# Altium PCB PCB1.PcbDoc
Units mm, origin at the board's own origin, x right, y up, seen from the top; angles counter-clockwise.
Board outline 110 x 98 mm, 2 copper layers (Top Layer, Bottom Layer); 74 components, 67 nets, 275 pads, 20 vias.
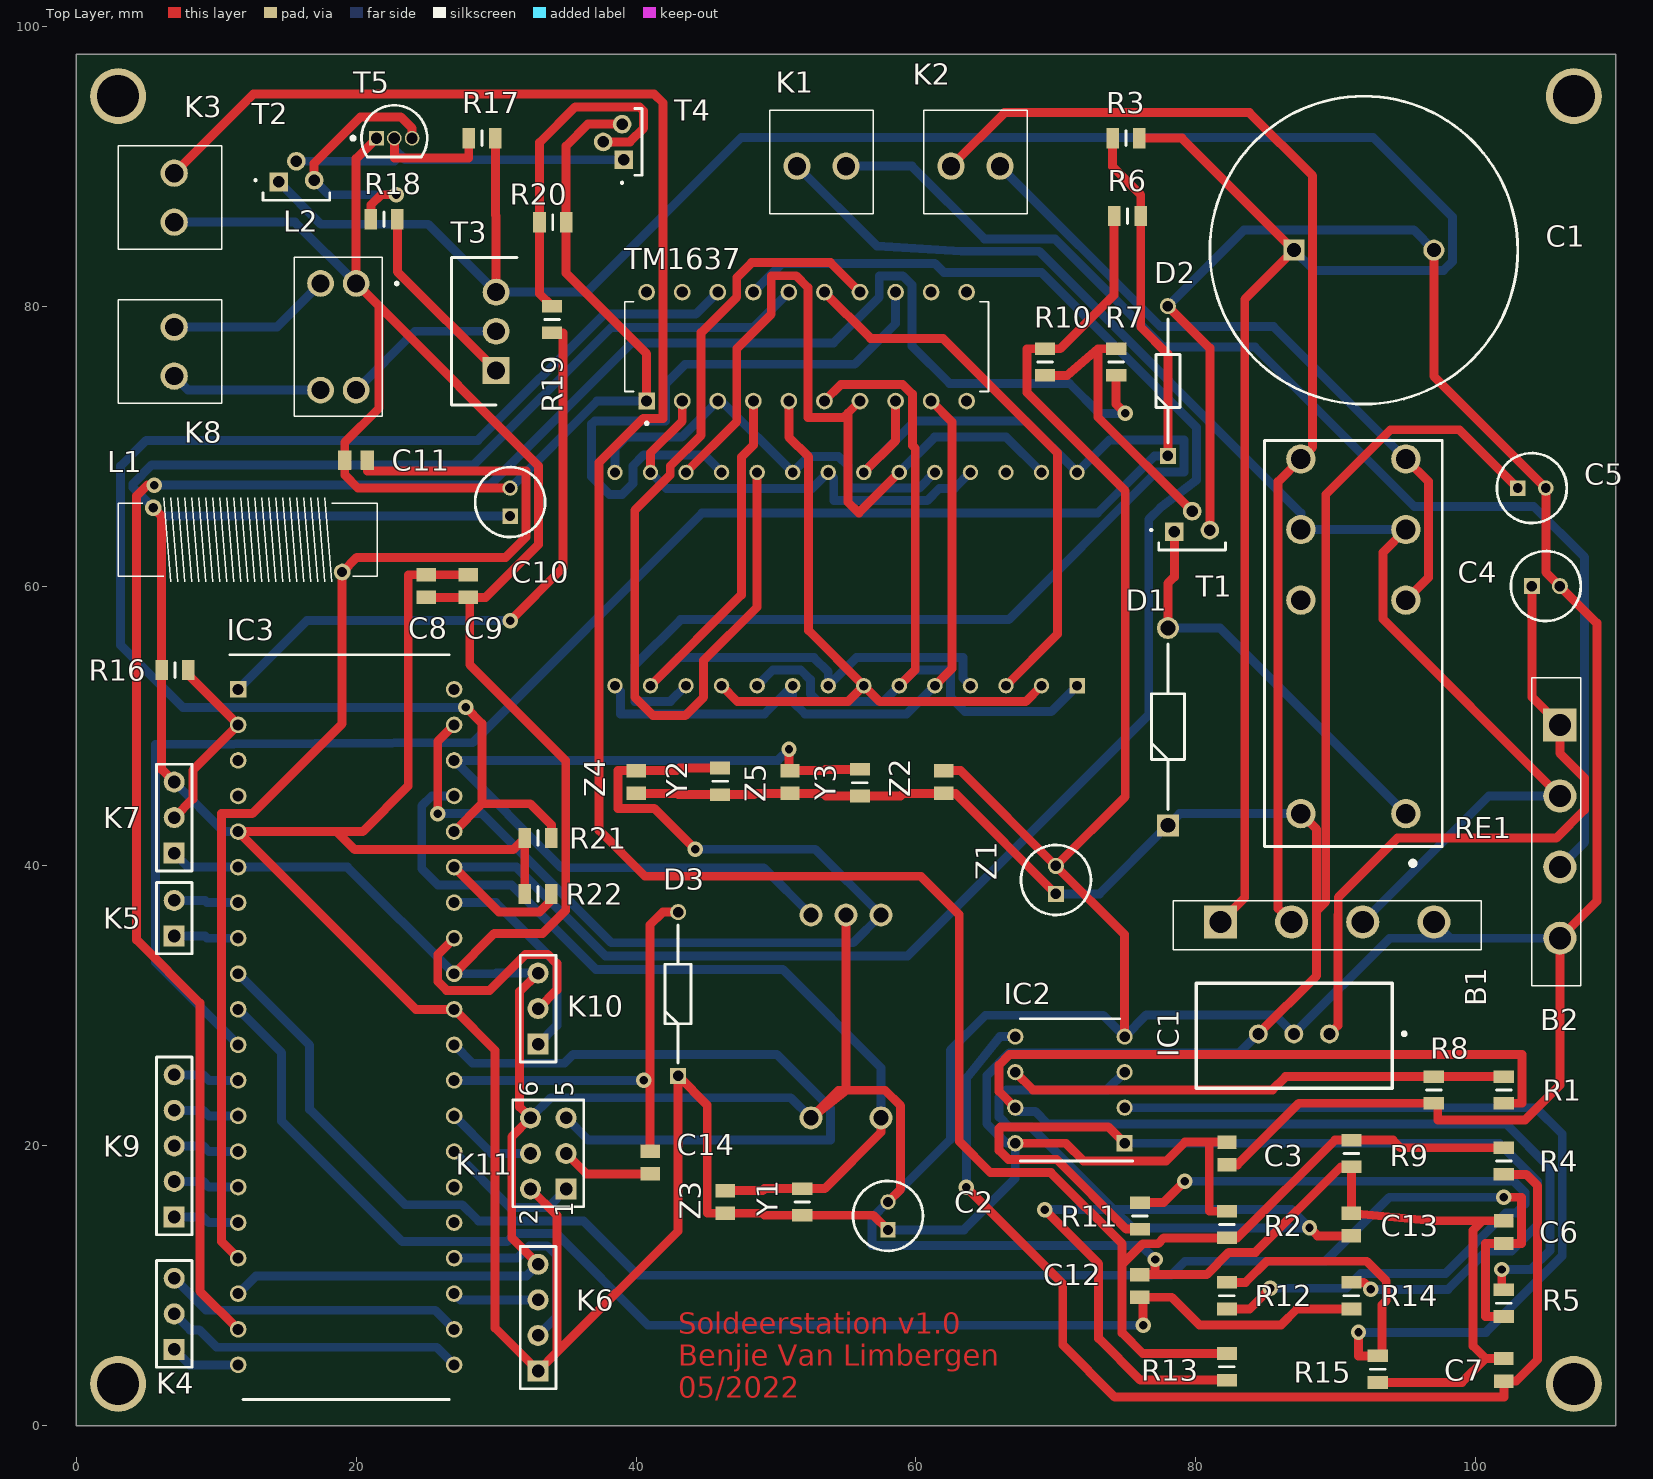
[diagram p0: Top Layer view]
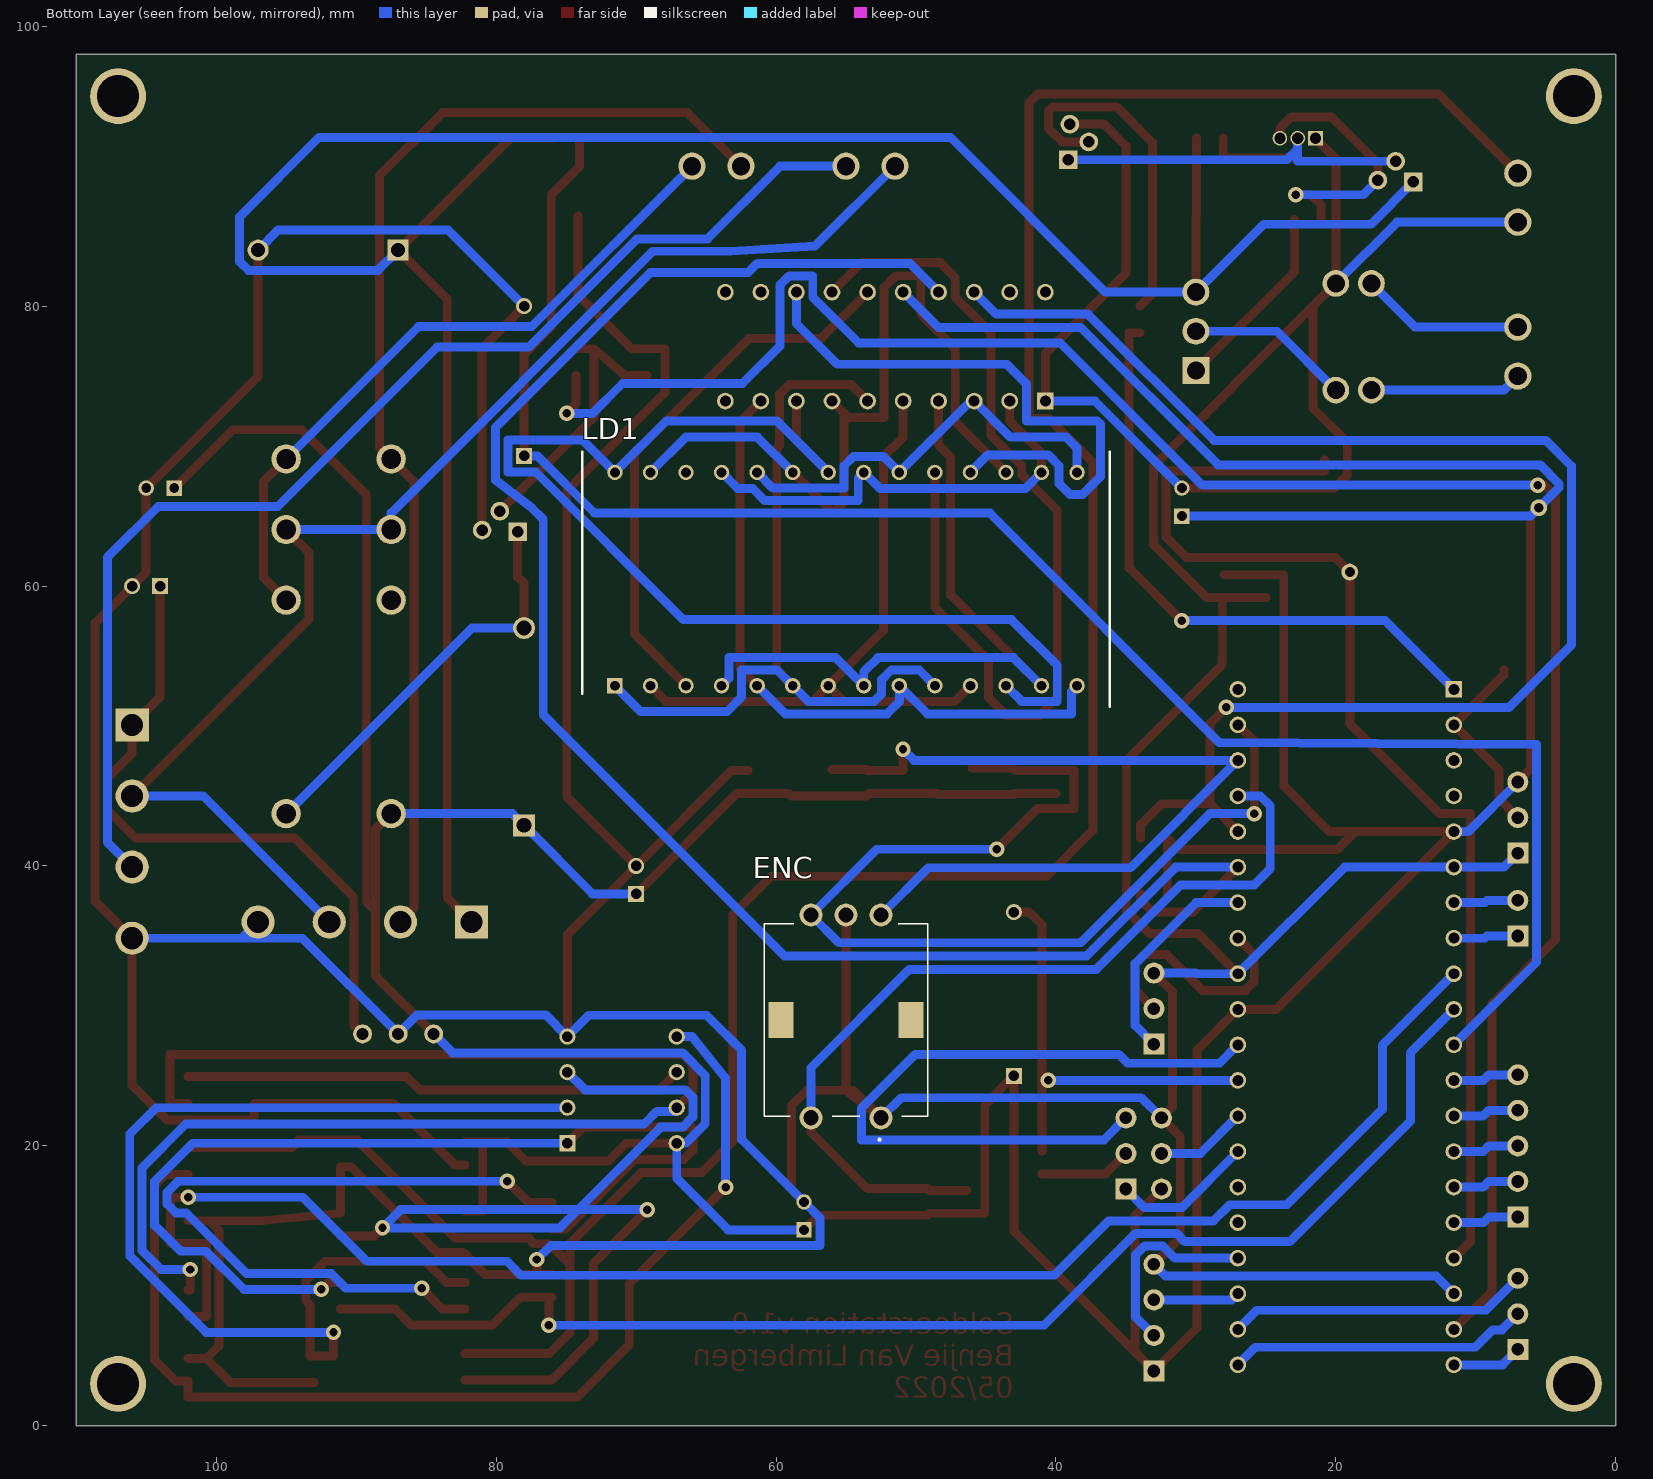
[diagram p1: Bottom Layer view, seen from below]

## Layer stack, top to bottom
Top Solder: solder mask 0.0102, Solder Resist, Dk 3.5
Top Layer: signal copper 0.0356
Dielectric 1: dielectric 0.32, FR-4, Dk 4.8
Bottom Layer: signal copper 0.0356
Bottom Solder: solder mask 0.0102, Solder Resist, Dk 3.5

## Board outline
0,0 0,98 110,98 110,0

## Design rules (kind name [scope] priority, off if disabled: settings)
Clearance Clearance_1 [All] p1: gap=0.254 ignorepadtopadclearanceinfootprint=FALSE except(0: Arc-Hole Track-Hole SMDPad-Hole THPad-Hole Via-Hole Fill-Hole Poly-Hole Region-Hole Text-Hole)
Clearance [All] p2: gap=0.254 ignorepadtopadclearanceinfootprint=FALSE except(0: Arc-Hole Track-Hole SMDPad-Hole THPad-Hole Via-Hole Fill-Hole Poly-Hole Region-Hole Text-Hole)
PolygonConnect [All] p1: connectstyle=Relief reliefconductorwidth=0.254 reliefentries=4 polygonreliefangle="90 Angle" airgapwidth=0.254
RoomDefinition voeding [InComponentClass('voeding')] p1: confinementstyle=ConfineIn formatcopy=TRUE lockcomponents=FALSE outline 0,-12 7,-12 7,-9 0,-9
RoomDefinition opamps [InComponentClass('opamps')] p2: confinementstyle=ConfineIn formatcopy=TRUE lockcomponents=FALSE outline 111,-10 122,-10 122,3 111,3
RoomDefinition main [InComponentClass('main')] p3: confinementstyle=ConfineIn formatcopy=TRUE lockcomponents=FALSE outline 0,-12 50.8,-12 50.8,13.4 0,13.4
RoomDefinition display [InComponentClass('display')] p4: confinementstyle=ConfineIn formatcopy=TRUE lockcomponents=FALSE outline 0,-12 50.8,-12 50.8,13.4 0,13.4
RoutingVias [All] p1: holewidth=0.6 width=1.1 viastyle="Through Hole" minholewidth=0.6 minwidth=1.1 maxholewidth=0.6 maxwidth=1.1
SolderMaskExpansion [All] p1: expansion=0.102 istentingtop=FALSE
Width [All] p1: maxlimit=1.27 minlimit=0.635 preferedwidth=0.635 minimp=50.000000 maximp=50.000000 favimp=50.000000
30 further rules are at their usual default settings.

## Classes and differential pairs
component class voeding: B1 B2 C1 C4 C5 D1 D2 IC1 K1 K2 R3 R6 R7 R10 RE1 T1
component class opamps: C2 C3 C6 C7 C12 C13 IC2 K3 R1 R2 R4 R5 R8 R9 R11 R12 R13 R14 R15
component class main: C8 C9 C10 C11 C14 D3 IC3 K4 K5 K6 K7 K8 K9 K10 K11 L1 L2 R16 R17 R18 R19 R20 R21 R22 T2 T3 T4 T5
component class display: ENC LD1 TM1637 Y1 Y2 Y3 Z1 Z2 Z3 Z4 Z5

## Components (designator, comment, footprint, x,y, rotation, side; value= is the part's Value field where it differs from the comment)
B1 "GBU6J" GBU6J 81.76,36 r180 top
B2 "GBU6J" GBU6J 106,50.08 r90 top
C1 "860010683032" CAPPRD1000W80D2200H4100 87,84 r0 top
C2 "860240672002" CAPPRD200W52D500H1250 58,14 r90 top
C3 "885012207098" CAPC2012X90N 82.22,19.46 r90 top
C4 "100uF" CAPPRD200W55D500H1200 104,60 r0 top
C5 "860010683032" CAPPRD200W52D500H1250 103,67 r0 top
C6 "885012205067" CAPC2012X90N 102,13.84 r90 top
C7 "885012205067" CAPC2012X90N 102,4 r90 top
C8 "885012207098" CAPC2012X90N 25,60 r90 top
C9 "885012207098" CAPC2012X90N 28,60 r90 top
C10 "860240672002" CAPPRD200W52D500H1250 31,65 r90 top
C11 "885012207098" CAPC2012X90N 20,69 r0 top
C12 "885012205067" CAPC2012X90N 76,10 r90 top
C13 "885012205067" CAPC2012X90N 91.11,14.38 r90 top
C14 "885012207092" CAPC2012X90N 41,18.81 r90 top
D1 "1N4007" DIOAD1410W86L470D235 78,42.9 r90 top
D2 "1N5231BTR" DIOAD1068W53L380D172 78,69.3 r90 top
D3 "1N4148" DIOAD1165W56L425D185 43,25 r90 top
ENC "482016514001" 482016514001 55,29 r90 bottom locked
IC1 "TSR_2-2450" TSR-2 94.04,24.11 r180 top
IC2 "MCP6002-E_P" DIP781W56P254L950H533Q8N 71,24 r180 top
IC3 "ATMEGA4809-PF" DIP1543W58P254L5175H635Q40N 19.285,28.49 r0 top
K1 "691214110002" 691214110002 51.5,90 r0 top
K2 "691214110002" 691214110002 62.5,90 r0 top
K3 "691214110002" 691214110002 7,86 r90 top
K4 "61300311121" HDR1X3 7,5.46 r90 top
K5 "61300211121" HDR1X2 7,35 r90 top
K6 "61000418221" HDR1X4 33,3.92 r90 top
K7 "61300311121" HDR1X3 7,40.92 r90 top
K8 "691214110002" 691214110002 7,75 r90 top
K9 "61300511121" HDR1X5 7,14.92 r90 top
K10 "61300311121" HDR1X3 33,27.271 r90 top
K11 "61000621121" HDR2X3 35,16.92 r90 top
L1 "744711003" 744711003 19,61 r180 top
L2 "CM2545X171B-10" CM2545X171B10 20,81.62 r180 top
LD1 "LB-603MF" DIP1524W50P254L3750H820Q28N 55,60.5 r90 bottom locked
R1 "smd" RESC2012X60N 102,24 r90 top
R2 "smd" RESC2012X60N 82.22,14.38 r90 top
R3 "CRCW08051M00JNEAC" RESC2012X60N 75,92 r0 top
R4 "smd" RESC2012X60N 102,18.92 r90 top
R5 "smd" RESC2012X60N 102,8.76 r90 top
R6 "CRCW08051M00JNEAC" RESC2012X60N 75.11,86.434 r0 top
R7 "CRCW08051M00JNEAC" RESC2012X60N 74.3,76.004 r90 top
R8 "smd" RESC2012X60N 97,24 r90 top
R9 "smd" RESC2012X60N 91.11,19.46 r90 top
R10 "CRCW08051M00JNEAC" RESC2012X60N 69.22,76.004 r90 top
R11 "smd" RESC2012X60N 76,15 r90 top
R12 "smd" RESC2012X60N 82.22,9.3 r90 top
R13 "smd" RESC2012X60N 82.22,4.22 r90 top
R14 "smd" RESC2012X60N 91.11,9.3 r90 top
R15 "smd" RESC2012X60N 93,4.05 r90 top
R16 "C" RESC2012X60N 7.05,54 r0 top
R17 "smd" RESC2012X60N 29,92 r0 top
R18 "smd" RESC2012X60N 22,86.209 r0 top
R19 "smd" RESC2012X60N 34,79.05 r90 top
R20 "smd" RESC2012X60N 34.05,86 r0 top
R21 "CRCW08051M00JNEAC" RESC2012X60N 33,42 r0 top
R22 "CRCW08051M00JNEAC" RESC2012X60N 33,38 r0 top
RE1 "RT424005" RT42 91.25,43.74 r90 top (schematic designator X1)
T1 "BC547CBU" BC547CBU 78.46,64 r0 top
T2 "BC547CBU" BC547CBU 14.46,89 r0 top
T3 "IRF9Z34NPBF" TO254P469X1042X1967-3P 30,75.666 r90 top
T4 "BC547CBU" BC547CBU 39,90.46 r90 top
T5 "BC557CG" ONSC-TO-92-3-29-11 22.73,92 r0 top
TM1637 "*" DIP778W43P254L2612H431Q20N 52.19,77.11 r90 top
Y1 "ESR10EZPJ183" RESC2012X60N 51.875,16 r90 top
Y2 "ESR10EZPJ183" RESC2012X60N 46,46.05 r90 top
Y3 "ESR10EZPJ183" RESC2012X60N 56,45.95 r90 top
Z1 "860010683032" CAPPRD200W55D500H1200 70,38 r90 top
Z2 "860240672002" CAPC2012X90N 62,46 r90 top
Z3 "100uF" CAPC2012X90N 46.375,16 r90 top
Z4 "100uF" CAPC2012X90N 40,46 r90 top
Z5 "100uF" CAPC2012X90N 51,46 r90 top

## Footprints (in the part's own frame and the unit in brackets; to place one, negate y for a bottom-side part, rotate by r counter-clockwise, add the part's x,y. Pads: shape width x height; smd on the part's side, far side on the other; paste and mask are expansions set on the pad)
744711003 [mm]
  round 1.2 hole 0.7: 1(0,0) 2(13.5,-4.6)
  silkscreen extent -2.5,-5.3 16,0.7, body extent -2.5,-4.9 16,0.3, height 6.3
482016514001 [mm]
  round 1.65 hole 1.1: 1(-7,-2.5) 2(-7,2.5) 3(7.5,-2.5) 4(7.5,0) 5(7.5,2.5)
  rect 2.6x1.8 smd: MP1(0,-4.65) MP2(0,4.65)
  silkscreen extent -8.6,-5.85 6.88,5.85, body extent -7.45,-5.85 7.95,5.85, height 27
691214110002 [mm]
  round 1.95 hole 1.3: 1(0,0) 2(3.5,0)
  silkscreen extent -1.95,-3.4 5.45,4, body extent -1.95,-3.4 5.45,4, height 8.8
BC547CBU [mm]
  rect 1.333x1.333 hole 0.82: 1(0,-0.127)
  round 1.333 hole 0.82: 2(1.27,1.35) 3(2.54,0)
  silkscreen extent -1.7,-1.43 3.65,0.05, body extent -1.11,-1.43 3.65,2.19, height 5.43
CAPC2012X90N [mm]
  rect 0.96x1.39 smd: 1(-0.81,0) 2(0.81,0)
  body extent -1,-0.63 1,0.63, height 0.9
CAPPRD200W52D500H1250 [mm]
  rect 1.1x1.1 hole 0.7: 1(0,0)
  round 1.1 hole 0.7: 2(2,0)
  silkscreen extent -1.5,-2.5 3.5,2.5, body extent -1.75,-2.75 3.75,2.75, height 12.5
CAPPRD200W55D500H1200 [mm]
  rect 1.15x1.15 hole 0.75: 1(0,0)
  round 1.15 hole 0.75: 2(2,0)
  silkscreen extent -1.5,-2.5 3.5,2.5, body extent -1.75,-2.75 3.75,2.75, height 12
CAPPRD1000W80D2200H4100 [mm]
  rect 1.5x1.5 hole 1: 1(0,0)
  round 1.5 hole 1: 2(10,0)
  silkscreen extent -6,-11 16,11, body extent -6.25,-11.25 16.25,11.25, height 41
CM2545X171B10 [mm]
  round 1.905 hole 1.27: 1(0,0) 2(2.54,0) 3(2.54,7.62) 4(0,7.62)
  silkscreen extent -3,-1.88 4.42,9.5, body extent -1.88,-1.88 4.42,9.5, height 9.6
DIOAD1068W53L380D172 [mm]
  rect 1.15x1.15 hole 0.75: 1(0,0)
  round 1.15 hole 0.75: 2(10.7,0)
  silkscreen extent 0.93,-0.86 9.78,0.86, body extent -0.26,-0.95 10.95,0.95, height 1.9
DIOAD1165W56L425D185 [mm]
  rect 1.15x1.15 hole 0.75: 1(0,0)
  round 1.15 hole 0.75: 2(11.7,0)
  silkscreen extent 0.93,-0.93 10.78,0.92, body extent -0.28,-0.92 11.93,0.92, height 1.84
DIOAD1410W86L470D235 [mm]
  rect 1.575x1.575 hole 1.05: 1(0,0)
  round 1.575 hole 1.05: 2(14.1,0)
  silkscreen extent 1.14,-1.18 12.96,1.18, body extent -0.43,-1.35 14.53,1.35, height 2.69
DIP778W43P254L2612H431Q20N [mm] "TM1637"
  rect 1.19x1.19 hole 0.79: 1(-3.89,11.43)
  round 1.19 hole 0.79: 2(-3.89,8.89) 3(-3.89,6.35) 4(-3.89,3.81) 5(-3.89,1.27) 6(-3.89,-1.27) 7(-3.89,-3.81) 8(-3.89,-6.35) 9(-3.89,-8.89) 10(-3.89,-11.43) 11(3.89,-11.43) 12(3.89,-8.89) 13(3.89,-6.35) 14(3.89,-3.81) 15(3.89,-1.27) 16(3.89,1.27) 17(3.89,3.81) 18(3.89,6.35) 19(3.89,8.89) 20(3.89,11.43)
  silkscreen extent -5.58,-13 3.2,13, body extent -4.03,-13 4.03,13, height 4.31
DIP781W56P254L950H533Q8N [mm]
  rect 1.158x1.158 hole 0.758: 1(-3.905,3.81)
  round 1.158 hole 0.758: 2(-3.905,1.27) 3(-3.905,-1.27) 4(-3.905,-3.81) 5(3.905,-3.81) 6(3.905,-1.27) 7(3.905,1.27) 8(3.905,3.81)
  silkscreen extent -4.48,-5.08 3.56,5.08, body extent -4.04,-4.75 4.04,4.75, height 5.33
DIP1524W50P254L3750H820Q28N [mm]
  rect 1.1x1.1 hole 0.7: 1(-7.62,16.51)
  round 1.1 hole 0.7: 2(-7.62,13.97) 3(-7.62,11.43) 4(-7.62,8.89) 5(-7.62,6.35) 6(-7.62,3.81) 7(-7.62,1.27) 8(-7.62,-1.27) 9(-7.62,-3.81) 10(-7.62,-6.35) 11(-7.62,-8.89) 12(-7.62,-11.43) 13(-7.62,-13.97) 14(-7.62,-16.51) 15(7.62,-16.51) 16(7.62,-13.97) 17(7.62,-11.43) 18(7.62,-8.89) 19(7.62,-6.35) 20(7.62,-3.81) 21(7.62,-1.27) 22(7.62,1.27) 23(7.62,3.81) 24(7.62,6.35) 25(7.62,8.89) 26(7.62,11.43) 27(7.62,13.97) 28(7.62,16.51)
  silkscreen extent -9.1,-18.85 9.1,18.85, body extent -9,-18.75 9,18.75, height 8.2
DIP1543W58P254L5175H635Q40N [mm]
  rect 1.184x1.184 hole 0.784: 1(-7.715,24.13)
  round 1.184 hole 0.784: 2(-7.715,21.59) 3(-7.715,19.05) 4(-7.715,16.51) 5(-7.715,13.97) 6(-7.715,11.43) 7(-7.715,8.89) 8(-7.715,6.35) 9(-7.715,3.81) 10(-7.715,1.27) 11(-7.715,-1.27) 12(-7.715,-3.81) 13(-7.715,-6.35) 14(-7.715,-8.89) 15(-7.715,-11.43) 16(-7.715,-13.97) 17(-7.715,-16.51) 18(-7.715,-19.05) 19(-7.715,-21.59) 20(-7.715,-24.13) 21(7.715,-24.13) 22(7.715,-21.59) 23(7.715,-19.05) 24(7.715,-16.51) 25(7.715,-13.97) 26(7.715,-11.43) 27(7.715,-8.89) 28(7.715,-6.35) 29(7.715,-3.81) 30(7.715,-1.27) 31(7.715,1.27) 32(7.715,3.81) 33(7.715,6.35) 34(7.715,8.89) 35(7.715,11.43) 36(7.715,13.97) 37(7.715,16.51) 38(7.715,19.05) 39(7.715,21.59) 40(7.715,24.13)
  silkscreen extent -8.31,-26.61 7.37,26.61, body extent -7.86,-25.88 7.86,25.88, height 6.35
GBU6J [mm]
  rect 2.37x2.37 hole 1.58: 1(0,0)
  round 2.37 hole 1.58: 2(-5.08,0) 3(-10.16,0) 4(-15.24,0)
  silkscreen extent -18.62,-1.5 3.38,2, body extent -18.62,-1.5 3.38,2, height 18.9
HDR1X2 [mm] "Connector; Header; 2 Position"
  rect 1.5x1.5 hole 0.9: 1(0,0)
  round 1.5 hole 0.9: 2(2.54,0)
  silkscreen extent -1.27,-1.27 3.81,1.27
HDR1X3 [mm] "Connector; Header; 3 Position"
  rect 1.5x1.5 hole 0.9: 1(0,0)
  round 1.5 hole 0.9: 2(2.54,0) 3(5.08,0)
  silkscreen extent -1.27,-1.27 6.35,1.27
HDR1X4 [mm] "Connector; Header; 4 Position"
  rect 1.5x1.5 hole 0.9: 1(0,0)
  round 1.5 hole 0.9: 2(2.54,0) 3(5.08,0) 4(7.62,0)
  silkscreen extent -1.27,-1.27 8.89,1.27
HDR1X5 [mm] "Connector; Header; 5 Position"
  rect 1.5x1.5 hole 0.9: 1(0,0)
  round 1.5 hole 0.9: 2(2.54,0) 3(5.08,0) 4(7.62,0) 5(10.16,0)
  silkscreen extent -1.27,-1.27 11.43,1.27
HDR2X3 [mm] "Connector; Header; 3x2 Position"
  rect 1.5x1.5 hole 0.9: 1(0,0)
  round 1.5 hole 0.9: 2(0,2.54) 3(2.54,0) 4(2.54,2.54) 5(5.08,0) 6(5.08,2.54)
  silkscreen extent -1.27,-1.27 6.35,3.81
ONSC-TO-92-3-29-11 [mm] "TO, 3-Leads, Body Dia 4.7mm, Pitch 1.27mm"
  rect 1.05x1.05 hole 0.8: 1(-1.27,0)
  round 1.05 hole 0.8: 2(0,0) 3(1.27,0)
  silkscreen extent -3.07,-1.34 2.35,2.35, body extent -2.35,-1.33 2.36,2.36, height 7.87
RESC2012X60N [mm]
  rect 0.9x1.45 smd: 1(-0.95,0) 2(0.95,0)
  silkscreen extent 0,-0.53 0,0.53, body extent -1,-0.63 1,0.63, height 0.6
RT42 [mm]
  round 2.1 hole 1.4: 1(0,-3.75) 2(15.26,-3.75) 3(20.3,-3.75) 4(25.34,-3.75) 5(25.34,3.75) 6(20.3,3.75) 7(15.26,3.75) 8(0,3.75)
  silkscreen extent -3.67,-6.35 26.65,6.35, body extent -2.21,-6.35 26.79,6.35, height 15.86
TO254P469X1042X1967-3P [mm]
  rect 1.92x1.92 hole 1.28: 1(-0.254,0)
  round 1.92 hole 1.28: 2(2.54,0) 3(5.334,0)
  silkscreen extent -2.73,-1.49 7.81,3.2, body extent -2.67,-1.5 7.75,3.19, height 18.84
TSR-2 [mm]
  round 1.35 hole 0.85: 1(4.5,-3.89) 2(7.04,-3.89) 3(9.58,-3.89)
  silkscreen extent -0.96,-7.5 14,0, body extent 0.01,-7.5 14.01,0, height 10.33

## Part data
B1 B2: "Bridge Rectifier", Manufacturer_Name="GeneSiC Semiconductor", Datasheet Link=https://www.diodemodule.com/silicon_products/bridge_rectifiers/gbu6j.pdf, Height=18.8mm, Manufacturer_Part_Number=GBU6J
C1: "Capacitor C1 4700u 50v", Manufacturer_Name="Wurth Elektronik", Datasheet Link=https://componentsearchengine.com/Datasheets/2/860010683032.pdf, Height=41mm, Manufacturer_Part_Number=860010683032
C2: "Capacitor Polarised 10uf 50v stee 2mm 5x11mm", Manufacturer_Name="Wurth Elektronik", Datasheet Link=https://katalog.we-online.de/pbs/datasheet/860240672002.pdf, Height=12.5mm, Manufacturer_Part_Number=860240672002
C3: "Capacitor, C3,C8,C9,C11,C14 100nf", Manufacturer_Name="Wurth Elektronik", Mouser2 Part Number=710-885012207098, Datasheet Link=https://componentsearchengine.com//885012207098.pdf, Height=0.9mm, Manufacturer_Part_Number=885012207098, Mouser2 Price/Stock=https://www.mouser.com/Search/Refine.aspx?Keyword=710-885012207098
C4: library part ECA-1HHG2R2B, "Capacitor Polarised C4", Manufacturer_Name=Panasonic, Datasheet Link=http://industrial.panasonic.com/cdbs/www-data/pdf/RDF0000/ABA0000C1215.pdf, Height=12mm, Manufacturer_Part_Number=ECA-1HHG2R2B
C5: "Capacitor C5", Manufacturer_Name="Wurth Elektronik", Datasheet Link=https://componentsearchengine.com/Datasheets/2/860010683032.pdf, Height=41mm, Manufacturer_Part_Number=860010683032
C6 C7 C12 C13: "Capacitor C6, C7, C12,C13", Manufacturer_Name="Wurth Elektronik", Datasheet Link=https://katalog.we-online.com/pbs/datasheet/885012205067.pdf, Height=0.55mm, Manufacturer_Part_Number=885012205067
C8 C9 C11: "Capacitor, C3,C8,C9,C11,C14", Manufacturer_Name="Wurth Elektronik", Mouser2 Part Number=710-885012207098, Datasheet Link=https://componentsearchengine.com//885012207098.pdf, Height=0.9mm, Manufacturer_Part_Number=885012207098, Mouser2 Price/Stock=https://www.mouser.com/Search/Refine.aspx?Keyword=710-885012207098
C10: "Capacitor Polarised c10", Manufacturer_Name="Wurth Elektronik", Datasheet Link=https://katalog.we-online.de/pbs/datasheet/860240672002.pdf, Height=12.5mm, Manufacturer_Part_Number=860240672002
C14: "Capacitor c14 100n", Manufacturer_Name="Wurth Elektronik", Datasheet Link=https://katalog.we-online.com/pbs/datasheet/885012207092.pdf, Height=0.9mm, Manufacturer_Part_Number=885012207092
D1: "Diode D1", Manufacturer_Name=MULTICOMP, Datasheet Link=http://www.farnell.com/datasheets/1505911.pdf?_ga=2.248087493.396773729.1562531485-167411096.1502103357, Manufacturer_Part_Number=1N4007
D2: "Zener Diode D2", Manufacturer_Name="ON Semiconductor", Datasheet Link=https://componentsearchengine.com/Datasheets/1/1N5231BTR.pdf, Manufacturer_Part_Number=1N5231BTR
D3: "Diode D3", Manufacturer_Name=Nexperia, Datasheet Link=https://datasheet.datasheetarchive.com/originals/distributors/Datasheets-112/DSAP0040891.pdf, Manufacturer_Part_Number=1N4148
ENC: "Switch", Manufacturer_Name="Wurth Elektronik", Mouser2 Part Number=710-482016514001, Datasheet Link=https://componentsearchengine.com//482016514001.pdf, Height=26.9mm, Manufacturer_Part_Number=482016514001, Mouser2 Price/Stock=https://www.mouser.com/Search/Refine.aspx?Keyword=710-482016514001
IC1: "Power Supply IC1", Manufacturer_Name="Traco Power", Manufacturer_Part_Number="TSR 2-2450", Mouser2 Part Number=495-TSR2-2450, Datasheet Link="https://componentsearchengine.com//TSR 2-2450.pdf", Mouser2 Price/Stock=https://www.mouser.com/Search/Refine.aspx?Keyword=495-TSR2-2450
IC2: "IC Dual Opamp", Manufacturer_Name=Microchip, Manufacturer_Part_Number=MCP6002-E/P, Mouser2 Part Number=579-MCP6002-E/P, Datasheet Link=https://componentsearchengine.com//MCP6002-E_P.pdf, Height=5.334mm, Mouser2 Price/Stock=https://www.mouser.com/Search/Refine.aspx?Keyword=579-MCP6002-E%2FP
IC3: "Integrated Circuit", Manufacturer_Name=Microchip, Mouser2 Part Number=556-ATMEGA4809-PF, Datasheet Link=https://componentsearchengine.com//ATMEGA4809-PF.pdf, Height=6.35mm, Manufacturer_Part_Number=ATMEGA4809-PF, Mouser2 Price/Stock=https://www.mouser.com/Search/Refine.aspx?Keyword=556-ATMEGA4809-PF
K1 K2 K8: "Connector", Manufacturer_Name="Wurth Elektronik", Height=8.7mm, Manufacturer_Part_Number=691214110002
K3: "Connector K3", Manufacturer_Name="Wurth Elektronik", Height=8.7mm, Manufacturer_Part_Number=691214110002
K4 K7: "WR-PHD Pin Header, THT, pitch 2.54mm, Single Row, Vertical, 3p", Contact Resistance=20mOhm, Manufacturer="Wurth Elektronik", Operating Temperature="-40 to +105degC", Rated Current=3A, Withstanding Voltage=500VAC, Working Voltage=250VAC, ComponentLink1Description=Manufacturer, ComponentLink1URL=http://www.we-online.de, ComponentLink2Description=Datasheet, ComponentLink2URL=https://www.we-online.com/catalog/datasheet/61300311121.pdf, Gender="Pin Header", Manufacturer Part Number=61300311121, Mounting Technology=THT, Orientation=Vertical, Packaging=Bag, Pin Number=3, Pitch=2.54mm, Row Number=Single
K5: "WR-PHD Pin Header, THT, pitch 2.54mm, Single Row, Vertical, 2p", Contact Resistance=20mOhm, Manufacturer="Wurth Elektronik", Operating Temperature="-40 to +105degC", Rated Current=3A, Withstanding Voltage=500VAC, Working Voltage=250VAC, ComponentLink1Description=Manufacturer, ComponentLink1URL=http://www.we-online.de, ComponentLink2Description=Datasheet, ComponentLink2URL=https://www.we-online.com/catalog/datasheet/61300211121.pdf, Gender="Pin Header", Manufacturer Part Number=61300211121, Mounting Technology=THT, Orientation=Vertical, Packaging=Bag, Pin Number=2, Pitch=2.54mm, Row Number=Single
K6: "4p Header K6", Contact Resistance=20mOhm, Manufacturer="Wurth Elektronik", Operating Temperature="-40 to +125degC", Rated Current=3A, Withstanding Voltage=500VAC, Working Voltage=250VAC, ComponentLink1Description=Manufacturer, ComponentLink1URL=http://www.we-online.de, ComponentLink2Description=Datasheet, ComponentLink2URL=https://www.we-online.com/catalog/datasheet/61000418221.pdf, Gender="Pin Header", Manufacturer Part Number=61000418221, Mounting Technology=SMT, Orientation=Vertical, Packaging=Tube, Pin Number=4, Pitch=2.54mm, Row Number=Single
K9: "5P Header k9", Contact Resistance=20mOhm, Manufacturer="Wurth Elektronik", Operating Temperature="-40 to +105degC", Rated Current=3A, Withstanding Voltage=500VAC, Working Voltage=250VAC, ComponentLink1Description=Manufacturer, ComponentLink1URL=http://www.we-online.de, ComponentLink2Description=Datasheet, ComponentLink2URL=https://www.we-online.com/catalog/datasheet/61300511121.pdf, Gender="Pin Header", Manufacturer Part Number=61300511121, Mounting Technology=THT, Orientation=Vertical, Packaging=Bag, Pin Number=5, Pitch=2.54mm, Row Number=Single
K10: "3p header K10", Contact Resistance=20mOhm, Manufacturer="Wurth Elektronik", Operating Temperature="-40 to +105degC", Rated Current=3A, Withstanding Voltage=500VAC, Working Voltage=250VAC, ComponentLink1Description=Manufacturer, ComponentLink1URL=http://www.we-online.de, ComponentLink2Description=Datasheet, ComponentLink2URL=https://www.we-online.com/catalog/datasheet/61300311121.pdf, Gender="Pin Header", Manufacturer Part Number=61300311121, Mounting Technology=THT, Orientation=Vertical, Packaging=Bag, Pin Number=3, Pitch=2.54mm, Row Number=Single
K11: "WR-PHD Pin Header, SMT, pitch 2.54mm, Dual Row, Vertical, 6p", Contact Resistance=20mOhm, Manufacturer="Wurth Elektronik", Operating Temperature="-40 to +125degC", Rated Current=3A, Withstanding Voltage=500VAC, Working Voltage=250VAC, ComponentLink1Description=Manufacturer, ComponentLink1URL=http://www.we-online.de, ComponentLink2Description=Datasheet, ComponentLink2URL=https://www.we-online.com/catalog/datasheet/61000621121.pdf, Gender="Pin Header", Manufacturer Part Number=61000621121, Mounting Technology=SMT, Orientation=Vertical, Packaging=Tube, Pin Number=6, Pitch=2.54mm, Row Number=Dual
L1: "Inductor, Smoorspoel 10uH", Manufacturer_Name="Wurth Elektronik", Datasheet Link=https://www.we-online.de/katalog/datasheet/744711003.pdf, Height=6.2mm, Manufacturer_Part_Number=744711003
L2: "Transformer", Manufacturer_Name="Laird Technologies", Datasheet Link=https://datasheet.datasheetarchive.com/originals/dk/DKDS-7/122753.pdf, Height=9.5mm, Manufacturer_Part_Number=CM2545X171B-10
LD1: "Display", Manufacturer_Name="ROHM Semiconductor", Datasheet Link=https://datasheet.datasheetarchive.com/originals/distributors/Datasheets_SAMA/27b839e3b28040d1ff79b0bfb62b7eff.pdf, Height=8.2mm, Manufacturer_Part_Number=LB-603MF
R1 R4 R5 R8 R18: library part CRCW08051M00JNEAC, "100k", Manufacturer_Name=Vishay, Mouser2 Part Number=71-CRCW08051M00JNEAC, Datasheet Link=https://componentsearchengine.com//CRCW08051M00JNEAC.pdf, Height=0.6mm, Manufacturer_Part_Number=CRCW08051M00JNEAC, Mouser2 Price/Stock=https://www.mouser.com/Search/Refine.aspx?Keyword=71-CRCW08051M00JNEAC
R2: library part CRCW08051M00JNEAC, "1m", Manufacturer_Name=Vishay, Mouser2 Part Number=71-CRCW08051M00JNEAC, Datasheet Link=https://componentsearchengine.com//CRCW08051M00JNEAC.pdf, Height=0.6mm, Manufacturer_Part_Number=CRCW08051M00JNEAC, Mouser2 Price/Stock=https://www.mouser.com/Search/Refine.aspx?Keyword=71-CRCW08051M00JNEAC
R3 R6 R7 R10 R21 R22: "Resistor R1-22", Manufacturer_Name=Vishay, Mouser2 Part Number=71-CRCW08051M00JNEAC, Datasheet Link=https://componentsearchengine.com//CRCW08051M00JNEAC.pdf, Height=0.6mm, Manufacturer_Part_Number=CRCW08051M00JNEAC, Mouser2 Price/Stock=https://www.mouser.com/Search/Refine.aspx?Keyword=71-CRCW08051M00JNEAC
R9: library part CRCW08051M00JNEAC, "10m", Manufacturer_Name=Vishay, Mouser2 Part Number=71-CRCW08051M00JNEAC, Datasheet Link=https://componentsearchengine.com//CRCW08051M00JNEAC.pdf, Height=0.6mm, Manufacturer_Part_Number=CRCW08051M00JNEAC, Mouser2 Price/Stock=https://www.mouser.com/Search/Refine.aspx?Keyword=71-CRCW08051M00JNEAC
R11 R12: library part CRCW08051M00JNEAC, "18k", Manufacturer_Name=Vishay, Mouser2 Part Number=71-CRCW08051M00JNEAC, Datasheet Link=https://componentsearchengine.com//CRCW08051M00JNEAC.pdf, Height=0.6mm, Manufacturer_Part_Number=CRCW08051M00JNEAC, Mouser2 Price/Stock=https://www.mouser.com/Search/Refine.aspx?Keyword=71-CRCW08051M00JNEAC
R13 R14: library part CRCW08051M00JNEAC, "5k6", Manufacturer_Name=Vishay, Mouser2 Part Number=71-CRCW08051M00JNEAC, Datasheet Link=https://componentsearchengine.com//CRCW08051M00JNEAC.pdf, Height=0.6mm, Manufacturer_Part_Number=CRCW08051M00JNEAC, Mouser2 Price/Stock=https://www.mouser.com/Search/Refine.aspx?Keyword=71-CRCW08051M00JNEAC
R15: library part CRCW08051M00JNEAC, "100ohm", Manufacturer_Name=Vishay, Mouser2 Part Number=71-CRCW08051M00JNEAC, Datasheet Link=https://componentsearchengine.com//CRCW08051M00JNEAC.pdf, Height=0.6mm, Manufacturer_Part_Number=CRCW08051M00JNEAC, Mouser2 Price/Stock=https://www.mouser.com/Search/Refine.aspx?Keyword=71-CRCW08051M00JNEAC
R16 R20: library part CRCW08051M00JNEAC, "Resistor R1-22 / 4k7", Manufacturer_Name=Vishay, Mouser2 Part Number=71-CRCW08051M00JNEAC, Datasheet Link=https://componentsearchengine.com//CRCW08051M00JNEAC.pdf, Height=0.6mm, Manufacturer_Part_Number=CRCW08051M00JNEAC, Mouser2 Price/Stock=https://www.mouser.com/Search/Refine.aspx?Keyword=71-CRCW08051M00JNEAC
R17: library part CRCW08051M00JNEAC, "4k7", Manufacturer_Name=Vishay, Mouser2 Part Number=71-CRCW08051M00JNEAC, Datasheet Link=https://componentsearchengine.com//CRCW08051M00JNEAC.pdf, Height=0.6mm, Manufacturer_Part_Number=CRCW08051M00JNEAC, Mouser2 Price/Stock=https://www.mouser.com/Search/Refine.aspx?Keyword=71-CRCW08051M00JNEAC
R19: library part CRCW08051M00JNEAC, "10k", Manufacturer_Name=Vishay, Mouser2 Part Number=71-CRCW08051M00JNEAC, Datasheet Link=https://componentsearchengine.com//CRCW08051M00JNEAC.pdf, Height=0.6mm, Manufacturer_Part_Number=CRCW08051M00JNEAC, Mouser2 Price/Stock=https://www.mouser.com/Search/Refine.aspx?Keyword=71-CRCW08051M00JNEAC
RE1: "Relay or Contactor", Manufacturer_Name="TE Connectivity", Mouser2 Part Number=655-RT424005, Datasheet Link=https://componentsearchengine.com//RT424005.pdf, Manufacturer_Part_Number=RT424005, Mouser2 Price/Stock=https://www.mouser.com/Search/Refine.aspx?Keyword=655-RT424005
T1 T2 T4: "Transistor BJT NPN", Manufacturer_Name="ON Semiconductor", Datasheet Link=https://www.onsemi.com/pdf/datasheet/bc550-d.pdf, Height=5.33mm, Manufacturer_Part_Number=BC547CBU
T3: "MOSFET (P-Channel)", Manufacturer_Name=Infineon, Mouser2 Part Number=942-IRF9Z34NPBF, Datasheet Link=https://componentsearchengine.com//IRF9Z34NPBF.pdf, Height=4.69mm, Manufacturer_Part_Number=IRF9Z34NPBF, Mouser2 Price/Stock=https://www.mouser.com/Search/Refine.aspx?Keyword=942-IRF9Z34NPBF
T5: library part CMP-1048-01441-1, "Amplifier Transistor, PNP Silicon, 3-Pin TO-92, Pb-Free, Bulk Box", Manufacturer="On Semiconductor", ComponentLink1Description="Manufacturer URL", ComponentLink1URL=http://www.onsemi.com/, ComponentLink2Description=Datasheet, ComponentLink2URL=http://www.onsemi.com/pub_link/Collateral/BC556B-D.PDF, ComponentLink3Description="Package Specification", ComponentLink3URL=http://www.onsemi.cn/pub_link/Collateral/2N6426-D.PDF, DatasheetVersion="Rev. 3", IC Continuous (A)=-0.1, Mounting Technology="Through Hole", PackageDescription="3-Pin Transistor Outline, Body 4.825 x 3.685 mm, Pitch 1.27 mm", PackageReference=TO-92-3-29-11_AM_SL, PackageVersion="Rev. AM", Packing="Bulk Box", PartNumber=BC557CG, Polarity=PNP, RoHS=TRUE
TM1637: library part TM1637, "LED Drive Control Special Circuit", Package=Package, Availability="Not in stock", Check_prices=https://www.snapeda.com/parts/TM1637/Titan+Micro+Electronics/view-part/?ref=eda, MF="Titan Micro Electronics", MP=TM1637, Price=None, SnapEDA_Link=https://www.snapeda.com/parts/TM1637/Titan+Micro+Electronics/view-part/?ref=snap
Y1 Y2 Y3: "Resistor SMD 0805 10k", Manufacturer_Name="ROHM Semiconductor", Datasheet Link=https://datasheet.datasheetarchive.com/originals/distributors/Datasheets_SAMA/30ccb516c688c96e56c83a00b77a93f4.pdf, Height=0.65mm, Manufacturer_Part_Number=ESR10EZPJ183
Z1: "Capacitor C1", Manufacturer_Name="Wurth Elektronik", Datasheet Link=https://componentsearchengine.com/Datasheets/2/860010683032.pdf, Height=41mm, Manufacturer_Part_Number=860010683032
Z2: "Capacitor Polarised", Manufacturer_Name="Wurth Elektronik", Datasheet Link=https://katalog.we-online.de/pbs/datasheet/860240672002.pdf, Height=12.5mm, Manufacturer_Part_Number=860240672002
Z3 Z4 Z5: library part ECA-1HHG2R2B, "Capacitor Polarised C4 3,5mm 8x11mm", Manufacturer_Name=Panasonic, Datasheet Link=http://industrial.panasonic.com/cdbs/www-data/pdf/RDF0000/ABA0000C1215.pdf, Height=12mm, Manufacturer_Part_Number=ECA-1HHG2R2B

## Free pads (board coordinates)
  round 4 hole 3: 1(3,3) 1(3,95) 1(107,3) 1(107,95)

## Via types
v1: diameter 1.1, hole 0.6, Top Layer to Bottom Layer, 20 vias

## Nets (pads, with @x,y where several pads share a name; then routed paths per layer and width w, separated by ;. In a path a pad name is that pad's centre, name@x,y a point inside that pad or via, vN(x,y) a via of type N, cw(c..) or ccw(c..) an arc to the next point about the centre after c; other vN are vias at no path point)
+5: C2.1 C3.2 C5.1 C8.2 C9.2 C10.1 D1.1 D3.1 IC1.3 IC2.8 IC3.5 IC3.31 K6.1 K7.3 K11.2 L1.2 R2.2 R16.1 R21.1 R22.1 RE1.8 TM1637.16 Y1.1 Y2.1 Y3.1 Z1.1 Z2.1 Z3.1 Z4.1 Z5.1 | length 449.4
  Top Layer w0.635: L1.2 6.1,65 R16.1 6.1,46.9 K7.3 ; C9.2 C8.2 23.724,60.81 23.724,45.72 20.464,42.46 18.627,42.46 ; R22.1 R21.1 31.223,41.173 19.914,41.173 18.627,42.46 ; K11.2 34.341,15.039 34.341,5.261 ; Z4.1 42.951,45.19 43.041,45.1 Y2.1 48.438,45.1 48.528,45.19 Z5.1 53.391,45.19 53.581,45 Y3.1 58.903,45 59.093,45.19 Z2.1 62.81,45.19 Z1.1 ; C2.1 56.95,15.05 Y1.1 49.187,15.05 49.047,15.19 Z3.1 45.085,15.19 45.085,22.915 D3.1 43,13.92 34.341,5.261 ; IC2.8 70.712,20.19 71.98,18.923 77.876,18.923 79.223,20.27 80.95,20.27 ; R2.2 80.95,15.33 80.95,20.27 ; C3.2 80.95,20.27 ; IC1.3 88.621,32.161 88.621,36.805 ; RE1.8 88.621,42.619 88.621,36.805 ; C5.1 98.829,71.171 93.904,71.171 89.274,66.541 89.274,37.458 88.621,36.805 ; 18.627,42.46 IC3.5 24.27,29.76 IC3.31 29.921,26.839 29.921,6.999 K6.1 34.341,5.261
  Bottom Layer w0.635: K7.3 10.54,42.46 IC3.5 ; C10.1 6.1,65 L1.2 4.064,67.036 4.064,67.31 5.41,68.656 28.416,68.656 38.246,78.486 48.406,78.486 TM1637.16 ; C2.1 63.418,14 67.095,17.677 IC2.8 66.455,20.19 65.055,21.59 65.055,25.025 66.675,26.645 83.105,26.645 IC1.3 ; Z1.1 73.1,38 D1.1 78.84,43.74 RE1.8
GND: B1.4 B2.4 C1.2 C2.2 C3.1 C4.2 C5.2 C6.2 C7.2 C8.1 C9.1 C10.2 C11.1 C12.2 C13.2 D2.2 ENC.1 ENC.4 IC1.2 IC2.4 IC3.6 IC3.18 IC3.32 K3.1 K6.4 K7.1 K10.3 K11.6 L2.1 R6.1 R8.1 R9.1 R10.2 R15.1 R20.2 T1.3 T4.3 T5.1 TM1637.1 Z1.2 Z2.2 | length 638.7
  Top Layer w0.635: T5.1 20,90.54 L2.1 21.641,79.979 ; C8.1 C9.1 C9.1@28.118,59.19 ; IC3.32 29.879,35.179 33.325,35.179 34.976,36.83 34.976,47.523 28.118,54.381 C9.1@28.118,59.19 ; C10.2 20.135,67 19.19,67.945 C11.1 19.19,70.269 21.641,72.72 21.641,79.979 ; K6.4 31.115,13.425 31.115,20.655 K11.6 31.674,22.786 31.674,31.025 K10.3 ; T4.3 36.56,93 35,91.44 R20.2 35,82.348 40.76,76.588 TM1637.1 ; ENC.4 55,23.978 ; C2.2 58.903,16.903 58.903,22.86 57.785,23.978 55,23.978 ; Z2.2 63.19,46.81 Z1.2 ; R6.1 74.16,80.807 70.307,76.954 R10.2 67.92,76.954 67.92,73.838 74.955,66.802 74.955,44.955 Z1.2 ; IC2.4 74.905,35.095 Z1.2 ; C12.2 77.089,10.81 ; v1(77.089,11.887) 77.089,10.81 ; D2.2 81,77 T1.3 ; C3.1 82.963,18.65 87.363,23.05 R8.1 97.282,23.05 97.282,21.844 103.505,21.844 106,24.339 B2.4 108.646,37.486 108.646,57.355 C4.2 105,61 C5.2 97,75 C1.2 ; R15.1 99.001,3.1 100.711,4.81 ; C7.2 100.711,4.81 ; C6.2 100.477,14.65 ; 21.641,79.979 33.02,68.6 33.02,62.949 29.261,59.19 C9.1@28.118,59.19 ; 55,23.978 54.478,23.978 ENC.1 55,23.978 ; 77.089,10.81 80.772,10.81 82.357,12.395 84.252,12.395 90.367,18.51 R9.1 C13.2 96.806,14.65 100.477,14.65 ; 100.477,14.65 99.797,13.97 99.797,5.715 100.711,4.81
  Bottom Layer w0.635: K7.1 8,39.92 IC3.6 19.38,39.92 IC3.32 29.972,32.3 30.023,32.351 K10.3 ; K3.1 15.62,86 L2.1 ; IC3.18 12.849,10.719 32.179,10.719 K6.4 ; C10.2 37.22,73.22 TM1637.1 ; K11.6 33.904,23.444 51.056,23.444 ENC.1 ; v1(77.089,11.887) 76.098,12.878 56.871,12.878 56.871,14.871 C2.2 62.459,20.459 62.459,26.828 64.968,29.337 73.378,29.337 IC2.4 76.457,29.362 85.638,29.362 IC1.2 93.84,34.84 98.16,34.84 ; D2.2 83.446,85.446 95.554,85.446 C1.2 ; B1.4 98.16,34.84 ; B2.4 98.16,34.84
NetB1_2: B1.2 K2.1 RE1.5 | length 84
  Top Layer w0.635: K2.1 66.328,93.828 83.82,93.828 88.341,89.306 88.341,69.921 RE1.5 85.877,67.457 85.877,36.963 B1.2
NetB1_3: B1.3 B2.2 K1.1 RE1.3 RE1.6 | length 97.6
  Top Layer w0.635: RE1.3 93.37,62.41 93.37,57.63 B2.2
  Bottom Layer w0.635: K1.1 57.197,84.303 63.246,83.922 68.795,83.922 87.5,65.216 RE1.6 RE1.3 ; B1.3 100.92,45 B2.2
NetB2_1: B2.1 C4.1 IC1.1 | length 47.8
  Top Layer w0.635: IC1.1 90.145,28.605 90.145,36.5 90.17,36.525 90.17,37.77 94.386,41.986 105.74,41.986 107.757,44.003 107.757,46.294 106,48.051 B2.1 104,52.08 C4.1
NetB2_3: B2.3 K1.2 | length 87.2
  Bottom Layer w0.635: K1.2 59.708,90 64.897,84.811 69.926,84.811 77.668,77.069 84.221,77.069 95.606,65.684 104.14,65.684 107.772,62.052 107.772,41.692 B2.3
NetC6_1: C6.1 IC3.9 R5.1 | length 118
  Top Layer w0.635: R5.1 100.686,7.81 100.686,13.03 C6.1 103.276,13.03 103.276,16.332 v1(102.006,16.332)
  Bottom Layer w0.635: IC3.9 16.682,27.188 16.682,22.612 23.495,15.799 27.584,15.799 28.744,14.64 36.242,14.64 40.12,10.762 78.228,10.762 79.222,11.756 89.234,11.756 93.81,16.332 v1(102.006,16.332)
NetC7_1: C7.1 IC2.5 R4.1 | length 79.3
  Top Layer w0.635: v1(63.602,17.043) 70.485,10.16 70.485,5.78 74.207,2.057 102.006,2.057 C7.1@102.006,3.19 ; C7.1 C7.1@102.006,3.19 ; R4.1 103.594,17.97 104.419,17.145 104.419,4.739 102.87,3.19 C7.1@102.006,3.19
  Bottom Layer w0.635: v1(63.602,17.043) 63.602,24.841 65.989,27.813 67.095,27.813 IC2.5
NetC11_2: C11.2 IC3.17 L1.1 | length 85.3
  Top Layer w0.635: IC3.17 10.389,13.161 10.389,43.739 12.573,43.739 19,50.166 L1.1 20.052,62.052 30.683,62.052 32.131,63.5 32.131,68.224 20.81,68.224 C11.2
NetC12_1: C12.1 IC3.10 R14.1 | length 95.8
  Top Layer w0.635: C12.1 C12.1@76.225,9.19 ; v1(76.225,7.188) C12.1@76.225,9.19 ; R14.1 87.224,8.35 86.087,7.214 80.246,7.214 78.27,9.19 C12.1@76.225,9.19
  Bottom Layer w0.635: IC3.10 14.681,26.649 14.681,21.768 23.292,13.157 30.789,13.157 31.383,13.751 34.29,13.751 40.852,7.188 v1(76.225,7.188)
NetC13_1: C13.1 IC2.3 R13.1 | length 80.5
  Top Layer w0.635: v1(69.19,15.443) 73.05,11.582 73.05,6.248 76.029,3.27 R13.1 ; v1(88.113,14.148) 88.69,13.57 C13.1
  Bottom Layer w0.635: v1(69.19,15.443) 74.147,15.443 ; IC2.3 73.638,24.003 66.474,24.003 65.944,23.474 65.944,22.071 66.675,21.341 68.25,21.341 74.147,15.443 ; 74.147,15.443 86.817,15.443 v1(88.113,14.148) 75.443,14.148 74.147,15.443
NetC14_1: C14.1 K11.3 | length 6.6
  Top Layer w0.635: K11.3 36.46,18 C14.1
NetC14_2: C14.2 D3.2 IC3.29 | length 32.7
  Top Layer w0.635: v1(40.547,24.68) 40.996,24.232 ; C14.2 40.996,19.62 40.996,24.232 ; D3.2 43,36.703 41.91,36.703 40.996,35.789 40.996,24.232
  Bottom Layer w0.635: IC3.29 v1(40.547,24.68)
NetD1_2: D1.2 RE1.1 T1.1 | length 29.6
  Top Layer w0.635: D1.2 78,60.198 78.46,60.658 T1.1
  Bottom Layer w0.635: D1.2 81.74,57 RE1.1
NetD2_1: D2.1 IC3.11 R3.1 R6.2 | length 129
  Top Layer w0.635: R3.1 74.05,89.97 76.06,87.96 R6.2 76.06,78.511 78,76.571 D2.1
  Bottom Layer w0.635: IC3.11 5.664,33.126 5.664,48.666 28.321,48.819 44.723,65.22 72.967,65.22 77.047,69.3 D2.1
NetENC_2: ENC.2 IC3.37 Y1.2 Z3.2 | length 63.3
  Top Layer w0.635: Z3.2 49.047,16.81 49.187,16.95 Y1.2 53.475,16.95 57.5,20.975 ENC.2
  Bottom Layer w0.635: IC3.37 25.4,45 24.689,44.289 24.689,39.802 25.857,38.633 31.115,38.633 37.135,32.614 50.47,32.614 57.5,25.583 ENC.2
NetENC_3: ENC.3 IC3.38 Y3.2 Z5.2 | length 61
  Top Layer w0.635: v1(50.927,48.336) 50.927,46.81 Z5.2 53.442,46.81 53.532,46.9 Y3.2
  Bottom Layer w0.635: v1(50.927,48.336) 50.131,47.54 IC3.38 34.662,39.878 49.122,39.878 ENC.3
NetENC_5: ENC.5 IC3.39 Y2.2 Z4.2 | length 75.1
  Top Layer w0.635: v1(25.832,43.739) 25.832,48.912 IC3.39 ; v1(44.221,41.199) 41.3,44.12 38.71,44.12 38.71,46.81 Z4.2 42.901,46.81 43.091,47 Y2.2
  Bottom Layer w0.635: v1(25.832,43.739) 29.007,43.739 38.227,34.519 55.519,34.519 ENC.5 52.801,41.199 v1(44.221,41.199)
NetIC2_1: IC2.1 R11.1 R14.2 | length 72.6
  Top Layer w0.635: IC2.1 73.734,21.361 66.047,21.361 65.944,21.259 65.944,19.685 66.59,19.04 70.038,19.04 75.028,14.05 R11.1 ; R14.2 91.985,10.25 v1(92.481,9.754)
  Bottom Layer w0.635: IC2.1 101.679,20.19 104.394,17.475 104.394,14.324 102.545,12.475 100.732,12.475 98.011,9.754 v1(92.481,9.754)
NetIC2_2: IC2.2 R12.2 R15.2 | length 79
  Top Layer w0.635: R12.2 83.541,10.25 85.047,11.756 92.206,11.756 93.603,10.359 93.603,8.951 93.296,8.644 93.296,5 R15.2 91.618,5 v1(91.618,6.68)
  Bottom Layer w0.635: IC2.2 104.295,22.73 106.176,20.849 106.176,12.139 100.717,6.68 v1(91.618,6.68)
NetIC2_6: IC2.6 R1.2 R8.2 | length 35.8
  Top Layer w0.635: IC2.6 68.362,24.003 85.464,24.003 86.411,24.95 R8.2 R1.2
NetIC2_7: IC2.7 R1.1 R5.2 | length 97.6
  Top Layer w0.635: IC2.7 65.938,23.887 65.938,25.781 66.675,26.518 103.302,26.518 103.302,23.05 R1.1 ; v1(101.854,11.171) 101.854,9.71 R5.2
  Bottom Layer w0.635: IC2.7 67.095,22.469 68.52,22.469 69.424,21.565 102.159,21.565 105.287,18.436 105.287,12.523 103.935,11.171 v1(101.854,11.171)
NetIC3_1: IC3.1 R19.1 | length 44.4
  Top Layer w0.635: v1(31.013,57.531) 34.773,61.29 34.773,78.1 R19.1
  Bottom Layer w0.635: IC3.1 16.481,57.531 v1(31.013,57.531)
NetIC3_2: IC3.2 K7.2 R16.2 | length 13.9
  Top Layer w0.635: K7.2 8.331,44.791 8.331,46.841 IC3.2 8,53.65 R16.2
NetIC3_7: IC3.7 K5.2 | length 4.6
  Bottom Layer w0.635: K5.2 9.195,37.54 9.355,37.38 IC3.7
NetIC3_8: IC3.8 K5.1 | length 4.6
  Bottom Layer w0.635: K5.1 9.195,35 9.355,34.84 IC3.8
NetIC3_12: IC3.12 K9.5 | length 4.7
  Bottom Layer w0.635: K9.5 9.068,25.08 9.468,24.68 IC3.12
NetIC3_13: IC3.13 K9.4 | length 4.7
  Bottom Layer w0.635: K9.4 9.068,22.54 9.468,22.14 IC3.13
NetIC3_14: IC3.14 K9.3 | length 4.7
  Bottom Layer w0.635: K9.3 9.068,20 9.468,19.6 IC3.14
NetIC3_15: IC3.15 K9.2 | length 4.7
  Bottom Layer w0.635: K9.2 9.068,17.46 9.468,17.06 IC3.15
NetIC3_16: IC3.16 K9.1 | length 4.7
  Bottom Layer w0.635: K9.1 9.068,14.92 9.468,14.52 IC3.16
NetIC3_19: IC3.19 R7.1 | length 150.2
  Top Layer w0.635: v1(5.588,67.208) 5.08,67.208 4.318,66.446 4.318,34.722 8.839,30.201 8.839,9.631 IC3.19 ; R7.1 74.295,75.054 74.295,73 v1(74.955,72.339)
  Bottom Layer w0.635: v1(5.588,67.208) 29.54,67.208 39.7,77.368 54.097,77.368 57.373,80.645 57.373,82.167 59.055,82.167 59.707,81.515 59.707,77.165 62.399,74.473 70.968,74.473 73.101,72.339 v1(74.955,72.339)
NetIC3_20: IC3.20 K4.1 | length 5
  Bottom Layer w0.635: K4.1 8.1,4.36 IC3.20
NetIC3_21: IC3.21 K4.2 | length 21.5
  Bottom Layer w0.635: K4.2 8.142,6.858 8.788,6.858 10.033,5.613 25.747,5.613 IC3.21
NetIC3_22: IC3.22 K4.3 | length 21.5
  Bottom Layer w0.635: K4.3 9.285,8.255 25.645,8.255 IC3.22
NetIC3_23: IC3.23 K6.3 | length 6.2
  Bottom Layer w0.635: IC3.23 27.44,9 K6.3
NetIC3_24: IC3.24 K6.2 | length 14.2
  Bottom Layer w0.635: IC3.24 31.503,11.98 32.385,12.862 33.655,12.862 34.321,12.195 34.321,7.782 K6.2
NetIC3_27: IC3.27 K11.1 | length 10.2
  Bottom Layer w0.635: IC3.27 31.004,15.596 33.676,15.596 K11.1
NetIC3_28: IC3.28 K11.4 | length 6.6
  Bottom Layer w0.635: IC3.28 29.68,19.46 K11.4
NetIC3_30: IC3.30 K11.5 | length 51.1
  Bottom Layer w0.635: IC3.30 28.312,25.908 34.874,25.908 35.509,26.543 50.038,26.543 53.899,22.682 53.899,20.422 36.578,20.422 K11.5
NetIC3_33: IC3.33 K10.2 | length 17.4
  Top Layer w0.635: IC3.33 25.832,33.672 25.832,31.75 26.467,31.115 29.54,31.115 32.106,33.68 33.68,33.68 34.341,33.02 34.341,31.152 K10.2
NetIC3_34: IC3.34 K10.1 | length 15.5
  Bottom Layer w0.635: IC3.34 29.981,37.38 34.341,33.02 34.341,28.612 K10.1
NetIC3_35: IC3.35 R22.2 TM1637.17 | length 128
  Top Layer w0.635: IC3.35 30.217,36.703 33.096,36.703 33.95,37.557 R22.2
  Bottom Layer w0.635: IC3.35 31.454,39.92 37.795,33.579 59.411,33.579 76.632,50.8 76.632,64.77 77.47,65.608 80.036,67.564 80.036,71.336 68.962,82.409 61.988,82.409 61.341,83.056 50.436,83.056 TM1637.17
NetIC3_36: IC3.36 R21.2 TM1637.18 | length 103.8
  Top Layer w0.635: IC3.36 28.99,44.45 ; v1(27.838,51.333) 28.99,50.182 28.99,44.45 ; R21.2 33.95,42.944 32.444,44.45 28.99,44.45
  Bottom Layer w0.635: v1(27.838,51.333) 7.62,51.333 3.175,55.778 3.175,68.58 5.004,70.409 28.702,70.409 37.719,79.426 44.266,79.426 TM1637.18
NetK2_2: K2.2 RE1.2 RE1.4 | length 49.1
  Top Layer w0.635: RE1.2 96.622,60.622 96.622,67.458 RE1.4
  Bottom Layer w0.635: K2.2 77.456,78.544 85.536,78.544 RE1.4
NetK3_2: K3.2 R2.1 R4.2 R9.2 R13.2 | length 197
  Top Layer w0.635: K3.2 12.648,95.148 41.3,95.148 41.935,94.513 41.935,71.984 40.513,71.984 37.363,68.834 37.363,42.545 40.64,39.268 60.35,39.268 63.094,36.525 63.094,20.32 65.324,18.089 69.642,18.089 74.727,13.005 74.727,11.532 ; R13.2 76.2,5.17 74.727,6.643 74.727,11.532 ; R4.2 94.61,19.87 94.07,20.41 R9.2 89.936,20.41 82.956,13.43 R2.1 77.717,13.43 77.296,13.009 76.204,13.009 74.727,11.532
NetK8_1: K8.1 L2.3 | length 10.9
  Bottom Layer w0.635: K8.1 8,74 L2.3
NetK8_2: K8.2 L2.2 | length 11.8
  Bottom Layer w0.635: K8.2 14.34,78.5 L2.2
NetL2_4: L2.4 T3.2 | length 11.7
  Bottom Layer w0.635: L2.4 24.206,78.206 T3.2
NetLD1_1: LD1.1 LD1.6 LD1.10 TM1637.6 | length 57.4
  Top Layer w0.635: TM1637.6 54.637,74.397 59.055,74.397 59.741,73.711 59.741,70.053 59.944,69.85 59.944,54.014 LD1.6
  Bottom Layer w0.635: LD1.10 49.772,54.002 51.764,54.002 52.451,53.315 52.451,52.299 52.991,51.758 57.688,51.758 LD1.6 59.932,54.002 62.472,54.002 62.472,52.057 63.5,51.029 69.659,51.029 LD1.1
NetLD1_2: LD1.2 LD1.7 LD1.11 TM1637.5 | length 47.3
  Top Layer w0.635: LD1.11 47.25,51.74 55.13,51.74 LD1.7 ; TM1637.5 50.92,70.644 52.324,69.24 52.324,56.826 LD1.7 ; LD1.2 67.83,51.74 57.41,51.74 LD1.7
NetLD1_3: LD1.3 TM1637.15 | length 39.6
  Top Layer w0.635: TM1637.15 56.761,77.699 61.925,77.699 70.104,69.52 70.104,56.554 LD1.3
NetLD1_4: LD1.4 LD1.8 LD1.13 TM1637.4 | length 51
  Top Layer w0.635: LD1.13 47.523,59.373 47.523,69.215 48.38,70.072 TM1637.4
  Bottom Layer w0.635: LD1.13 43.041,54.891 52.705,54.891 53.73,53.866 LD1.8 55.741,54.891 63.361,54.891 63.361,53.409 LD1.4
NetLD1_5: LD1.5 LD1.9 LD1.14 TM1637.9 | length 49.3
  Top Layer w0.635: TM1637.9 62.586,71.714 62.586,54.116 LD1.5
  Bottom Layer w0.635: LD1.14 38.886,52.484 38.886,50.869 49.179,50.869 LD1.9 51.19,51.75 52.07,50.869 59.339,50.869 LD1.5
NetLD1_12: LD1.12 LD1.22 LD1.28 TM1637.8 | length 86.9
  Top Layer w0.635: LD1.22 58.54,70.39 TM1637.8
  Bottom Layer w0.635: LD1.12 42.448,51.758 39.903,51.758 39.903,54.331 43.18,57.607 66.624,57.607 77.165,68.148 79.147,68.148 79.147,70.447 73.837,70.447 LD1.28 67.824,71.806 59.956,71.806 LD1.22
NetLD1_15: LD1.15 LD1.20 LD1.24 TM1637.3 | length 30.9
  Bottom Layer w0.635: LD1.15 38.49,69.86 39.267,70.637 43.257,70.637 TM1637.3 46.09,73.22 LD1.20 52.336,69.266 54.458,69.266 55.143,68.58 55.143,66.998 60.228,66.998 LD1.24
NetLD1_16: LD1.16 LD1.21 LD1.25 TM1637.2 | length 32.5
  Top Layer w0.635: LD1.16 41.03,69.51 43.3,71.78 TM1637.2
  Bottom Layer w0.635: LD1.16 42.17,66.98 52.59,66.98 LD1.21 54.126,67.724 54.126,66.109 60.808,66.109 61.679,66.98 62.75,66.98 LD1.25
NetLD1_17: LD1.17 LD1.23 LD1.27 TM1637.7 | length 56.8
  Top Layer w0.635: LD1.17 47.193,71.743 47.193,76.962 49.657,79.426 49.657,82.169 51.435,82.169 52.273,81.331 52.273,72.034 54.814,72.034 55.143,72.363 ; TM1637.7 55.143,72.363 ; LD1.23 55.917,65.227 55.143,66.001 55.143,72.363
  Bottom Layer w0.635: LD1.23 61.327,70.637 66.453,70.637 LD1.27
NetLD1_18: LD1.18 TM1637.13 | length 44.5
  Bottom Layer w0.635: LD1.18 44.863,69.367 40.564,69.367 39.776,68.58 39.776,67.31 39.014,66.548 38.1,66.548 36.83,67.818 36.83,71.573 37.048,71.791 42.113,71.791 42.113,74.447 43.51,75.844 55.626,75.844 58.54,78.758 TM1637.13
NetLD1_19: LD1.19 TM1637.14 | length 66.8
  Top Layer w0.635: LD1.19 48.65,58.505 44.831,54.686 44.831,52.07 43.51,50.749 41.224,50.749 39.903,52.07 39.903,65.405 42.443,67.945 42.443,68.58 44.653,70.79 44.653,78.105 47.193,80.645 47.193,82.042 48.26,83.109 53.891,83.109 TM1637.14
NetR7_2: R7.2 R10.1 T1.2 | length 20.2
  Top Layer w0.635: R10.1 70.79,75.054 73,76.954 ; R7.2 73,76.954 ; T1.2 73,72.08 73,76.954
NetR11_2: R11.2 R12.1 | length 53.7
  Top Layer w0.635: R11.2 77.672,15.95 v1(79.197,17.475) ; R12.1 83.845,8.35 v1(85.325,9.83)
  Bottom Layer w0.635: v1(79.197,17.475) 102.718,17.475 103.505,16.688 103.505,15.848 102.87,15.213 102.157,15.213 97.819,10.875 91.792,10.875 90.746,9.83 v1(85.325,9.83)
NetR17_1: R17.1 T2.2 T4.1 T5.2 | length 33.5
  Top Layer w0.635: T5.2 22.73,90.605 22.75,90.585 28.05,90.585 R17.1
  Bottom Layer w0.635: T2.2 22.73,90.35 22.73,91.225 ; T5.2 22.73,91.225 ; T4.1 23.495,90.46 22.73,91.225
NetR18_1: R18.1 T2.3 T5.3 | length 20
  Top Layer w0.635: T2.3 17,90.203 20.32,93.523 23.187,93.523 24,92.71 T5.3 ; R18.1 21.05,87.224 21.787,87.96 v1(22.86,87.96)
  Bottom Layer w0.635: T2.3 18.04,87.96 v1(22.86,87.96)
NetR18_2: R18.2 T3.1 | length 13.7
  Top Layer w0.635: R18.2 22.95,82.462 T3.1
NetR19_2: R19.2 R20.1 T4.2 | length 25.2
  Top Layer w0.635: R19.2 33.1,80.9 R20.1 33.1,91.683 35.655,94.238 40.238,94.238 40.538,93.938 40.538,92.71 39.558,91.73 T4.2
VIN: B1.1 C1.1 R3.2 R17.2 T2.1 T3.3 | length 185
  Top Layer w0.635: R17.2 29.95,86.512 30,86.462 T3.3 ; R3.2 79,92 C1.1 83.49,80.49 83.49,37.73 B1.1
  Bottom Layer w0.635: T2.1 17.481,85.852 25.148,85.852 T3.3 36.474,81 47.523,92.05 92.659,92.05 98.323,86.385 98.323,83.185 97.688,82.55 88.45,82.55 C1.1
pads on no net: ENC.MP1 ENC.MP2 IC3.3 IC3.4 IC3.25 IC3.26 IC3.40 LD1.26 RE1.7 TM1637.10 TM1637.11 TM1637.12 TM1637.19 TM1637.20

## Other copper
Top Layer:
  text "Soldeerstation v1.0 / Benjie Van Limbergen / 05/2022" at 43,2 h1.52

## Text inside footprints (layer, text, board x,y; h text height)
K11: Top Overlay "1" at 35.508,14.888 h1.27 r90; Top Overlay "2" at 32.968,14.38 h1.27 r90; Top Overlay "5" at 35.508,23.524 h1.27 r90; Top Overlay "6" at 32.968,23.524 h1.27 r90